# EAGLE board ADE9000 Shield (EAGLE 9.6.2)
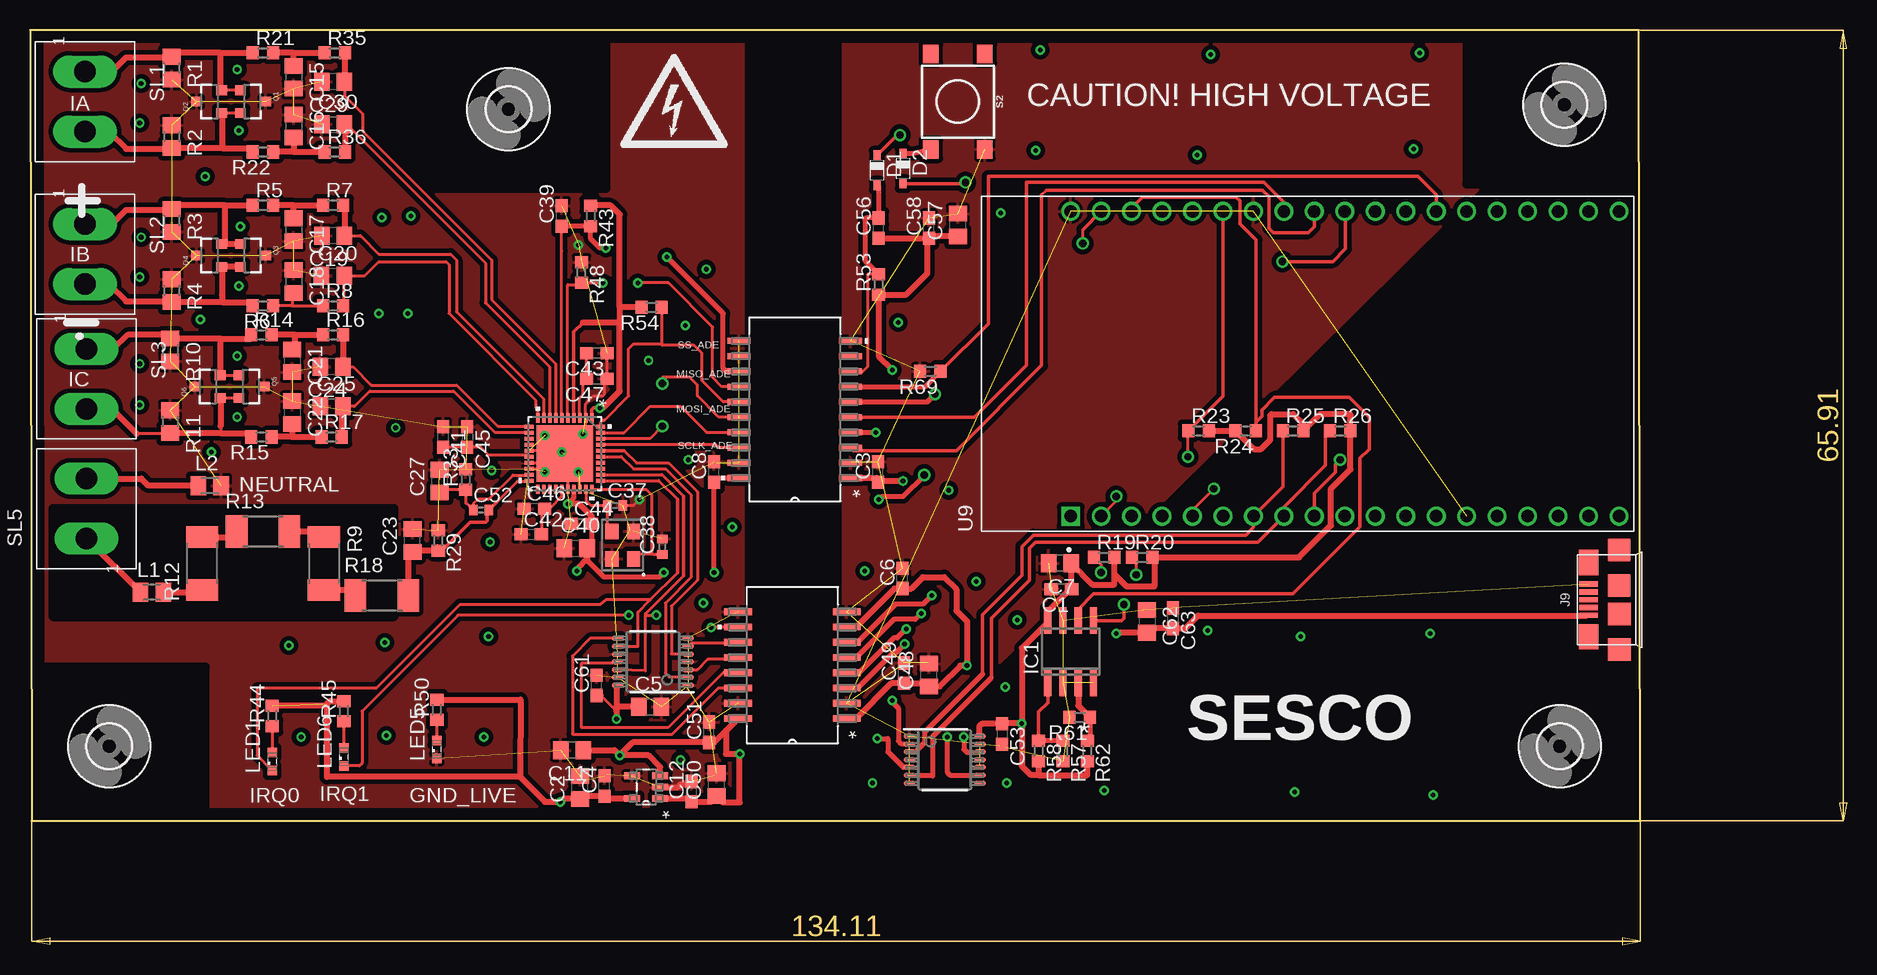
[diagram p0: board, top side]
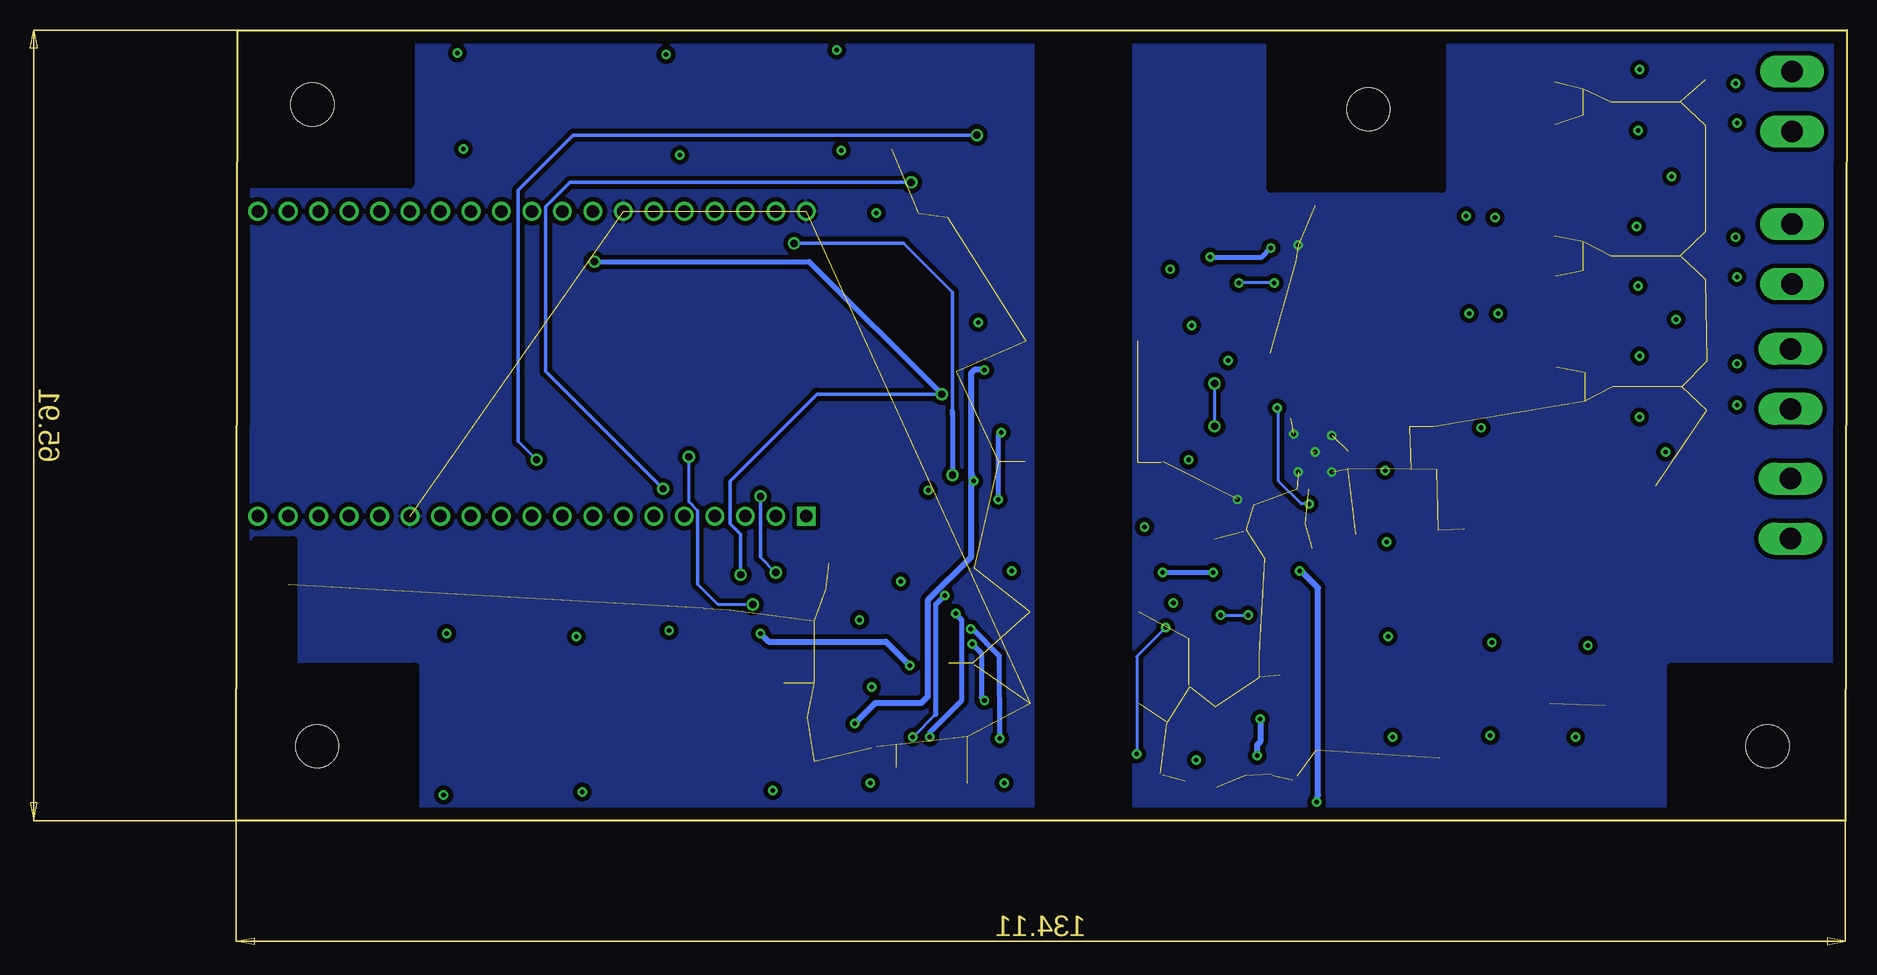
[diagram p1: board, bottom side, seen from below]

Size 134.24 x 65.91 mm. Coordinates in mm from the lower left corner, seen from the top.
Outline: 0.13,0 134.24,0 134.11,65.91 0,65.91 0.13,0
Copper layers (1*16): Top 0.035mm / dielectric 1.5mm / Bottom 0.035mm
Design rules "default": minimum track width 10mil, minimum drill 24mil, track to track 8mil, track to pad 8mil, pad to pad 8mil, via to via 8mil, smd to smd 8mil, copper to edge 40mil, drill to drill 8mil, minimum pad ring 10mil, minimum via ring 8mil, stop-mask expansion 4mil, vias tented up to drill 0mil, thermal gap 10mil
tRestrict: area 1.9,17 to 30.4,26; area 0.4,0.1 to 14.6,12.8; area 119.4,0.1 to 133.6,12.8; area 119.8,53.1 to 134,65.8; area 33.8,52.7 to 48,65.4; area 129.5,13.3 to 132.6,23.4; area 59.9,-0.1 to 67.3,66
bRestrict: area 0.4,0.1 to 14.6,12.8; area 119.4,0.1 to 133.6,12.8; area 119.8,53.1 to 134,65.8; area 33.8,52.7 to 48,65.4; area 129.5,13.3 to 132.6,23.4; area 59.9,-0.1 to 67.3,66

## Footprints (pad centres in the part's own frame; a part is rotated, then mirrored left to right if it is on the bottom)
C0603 = smd 1.1 x 1: 1 -0.85,0; 2 0.85,0
C0805 = smd 1.3 x 1.5: 1 -0.95,0; 2 0.95,0
C0402 = smd 0.7 x 0.9: 1 -0.65,0; 2 0.65,0
SOD323_ST = smd 0.8 x 0.6: A 1.25,0; C -1.25,0
3,6 = hole 3.6: 0,0
SO-08 = smd 0.6 x 2.2: 1 -1.905,-2.6; 2 -0.635,-2.6; 3 0.635,-2.6; 4 1.905,-2.6; 5 1.905,2.6; 6 0.635,2.6; 7 -0.635,2.6; 8 -1.905,2.6
USB-MICRO-10103594 = smd 0.4 x 1.6: D+ 0,0; D- -0.65,0; GND 1.3,0; ID 0.65,0; VBUS -1.3,0 | smd 1.9 x 1.9: SHLD1 -1.2,-2.55; SHLD2 1.2,-2.55; SHLD3 -4.15,-2.55; SHLD4 4.15,-2.55 | smd 2.1 x 1.6: SHLD5 3.1,0; SHLD6 -3.1,0
M0805 = smd 1.3 x 1.6: 1 -0.95,0; 2 0.95,0
SML0603 = smd 0.8 x 0.8: A 0.75,0; C -0.75,0
SOT23-3 = smd 0.8 x 0.9: 1 -0.95,-1; 2 0.95,-1; 3 0,1.1
SMD_4PIN_3.2X2.1 = smd 1.3 x 1.1: 1 -1.15,-0.9; 2 1.15,-0.9; 3 1.15,0.9; 4 -1.15,0.9
R0805 = smd 1.3 x 1.5: 1 -0.95,0; 2 0.95,0
R0603 = smd 1 x 1.1: 1 -0.85,0; 2 0.85,0
R2010 = smd 1.8 x 2.7: 1 -2.2,0; 2 2.2,0
TACTILE_SWITCH_SMD_6.2MM_TALL = smd 1.55 x 1.3: A1 -3.975,-2.25; A2 3.975,-2.25; B1 -3.975,2.25; B2 3.975,2.25
02P = drill 1.778 long: 1 -2.5,0; 2 2.5,0
CP_40_7 = smd 0.762 x 0.305: 1 -2.972,2.25; 2 -2.972,1.75; 3 -2.972,1.25; 4 -2.972,0.75; 5 -2.972,0.25; 6 -2.972,-0.25; 7 -2.972,-0.75; 8 -2.972,-1.25; 9 -2.972,-1.75; 10 -2.972,-2.25; 21 2.972,-2.25; 22 2.972,-1.75; 23 2.972,-1.25; 24 2.972,-0.75; 25 2.972,-0.25; 26 2.972,0.25; 27 2.972,0.75; 28 2.972,1.25; 29 2.972,1.75; 30 2.972,2.25 | smd 0.305 x 0.762: 11 -2.25,-2.972; 12 -1.75,-2.972; 13 -1.25,-2.972; 14 -0.75,-2.972; 15 -0.25,-2.972; 16 0.25,-2.972; 17 0.75,-2.972; 18 1.25,-2.972; 19 1.75,-2.972; 20 2.25,-2.972; 31 2.25,2.972; 32 1.75,2.972; 33 1.25,2.972; 34 0.75,2.972; 35 0.25,2.972; 36 -0.25,2.972; 37 -0.75,2.972; 38 -1.25,2.972; 39 -1.75,2.972; 40 -2.25,2.972 | smd 4.699 x 4.699: 41 0,0
RI_16_1 = smd 2.306 x 0.561: 1 -4.527,4.445; 2 -4.527,3.175; 3 -4.527,1.905; 4 -4.527,0.635; 5 -4.527,-0.635; 6 -4.527,-1.905; 7 -4.527,-3.175; 8 -4.527,-4.445; 9 4.527,-4.445; 10 4.527,-3.175; 11 4.527,-1.905; 12 4.527,-0.635; 13 4.527,0.635; 14 4.527,1.905; 15 4.527,3.175; 16 4.527,4.445
PW0014A_N = smd 0.95 x 0.45: 1 -2.95,1.95; 2 -2.95,1.3; 3 -2.95,0.65; 4 -2.95,0; 5 -2.95,-0.65; 6 -2.95,-1.3; 7 -2.95,-1.95; 8 2.95,-1.95; 9 2.95,-1.3; 10 2.95,-0.65; 11 2.95,0; 12 2.95,0.65; 13 2.95,1.3; 14 2.95,1.95
UJ_5 = smd 1.321 x 0.559: 1 -1.168,0.95; 2 -1.168,0; 3 -1.168,-0.95; 4 1.168,-0.95; 5 1.168,0.95
RI_20_1 = smd 1.921 x 0.511: 1 -4.65,5.715; 2 -4.65,4.445; 3 -4.65,3.175; 4 -4.65,1.905; 5 -4.65,0.635; 6 -4.65,-0.635; 7 -4.65,-1.905; 8 -4.65,-3.175; 9 -4.65,-4.445; 10 -4.65,-5.715; 11 4.65,-5.715; 12 4.65,-4.445; 13 4.65,-3.175; 14 4.65,-1.905; 15 4.65,-0.635; 16 4.65,0.635; 17 4.65,1.905; 18 4.65,3.175; 19 4.65,4.445; 20 4.65,5.715
ESPRESSIF_ESP32-DEVKITC-32UE = drill 1.04 square: 1 -12.7,22.86 | drill 1.04: 2 -12.7,20.32; 3 -12.7,17.78; 4 -12.7,15.24; 5 -12.7,12.7; 6 -12.7,10.16; 7 -12.7,7.62; 8 -12.7,5.08; 9 -12.7,2.54; 10 -12.7,0; 11 -12.7,-2.54; 12 -12.7,-5.08; 13 -12.7,-7.62; 14 -12.7,-10.16; 15 -12.7,-12.7; 16 -12.7,-15.24; 17 -12.7,-17.78; 18 -12.7,-20.32; 19 -12.7,-22.86; 20 12.7,22.86; 21 12.7,20.32; 22 12.7,17.78; 23 12.7,15.24; 24 12.7,12.7; 25 12.7,10.16; 26 12.7,7.62; 27 12.7,5.08; 28 12.7,2.54; 29 12.7,0; 30 12.7,-2.54; 31 12.7,-5.08; 32 12.7,-7.62; 33 12.7,-10.16; 34 12.7,-12.7; 35 12.7,-15.24; 36 12.7,-17.78; 37 12.7,-20.32; 38 12.7,-22.86

## Placement (x,y rotation side)
C1  0.1u  [C0603]  85.98,19.3 180 top
C2  10u  [C0805]  45.85,2.79 90 top
C3  0.1u  [C0603]  70.69,29.08 90 top
C4  0.1u  [C0603]  47.88,2.92 90 top
C5  4.7u  [C0805]  51.69,9.52 0 top
C6  0.1u  [C0603]  72.72,20.22 90 top
C7  4.7u  [C0805]  85.85,21.46 180 top
C8  0.1u  [C0603]  57.02,29.08 90 top
C11  10u  [C0805]  45.19,5.89 180 top
C12  0.1u  [C0603]  55.14,2.44 90 top
C15  DNP  [C0805]  21.97,61.98 270 top
C16  DNP  [C0805]  21.97,57.91 270 top
C17  DNP  [C0805]  21.97,49.28 270 top
C18  DNP  [C0805]  21.97,44.96 270 top
C19  0.022u  [C0805]  25.27,48.77 180 top
C20  0.022u  [C0805]  25.25,45.42 0 top
C21  DNP  [C0805]  21.84,38.35 270 top
C22  DNP  [C0805]  21.84,34.04 270 top
C23  0.022u  [C0805]  31.88,23.37 90 top
C24  0.022u  [C0805]  25.15,37.85 180 top
C25  0.022u  [C0805]  25.15,34.54 0 top
C27  0.022u  [C0805]  34.16,28.32 90 top
C29  0.022u  [C0805]  25.27,61.59 180 top
C30  0.022u  [C0805]  25.27,58.04 0 top
C37  18p  [C0402]  48.77,26.29 0 top
C38  18p  [C0402]  52.7,22.86 90 top
C39  1u  [C0603]  44.32,50.42 90 top
C40  4.7u  [C0805]  45.49,22.73 0 top
C41  4.7u  [C0603]  34.42,32 270 top
C42  4.7u  [C0603]  41.78,23.88 0 top
C43  4.7u  [C0603]  47.24,38.99 180 top
C44  0.1u  [C0603]  45.97,24.77 0 top
C45  0.1u  [C0603]  36.45,32 270 top
C46  0.1u  [C0603]  42.04,26.04 0 top
C47  0.1u  [C0603]  47.24,36.83 180 top
C48  10u  [C0805]  74.93,12.17 90 top
C49  0.1u  [C0603]  72.85,12.32 90 top
C50  10u  [C0805]  57.23,3.02 90 top
C51  0.1u  [C0603]  56.62,7.39 90 top
C52  51p  [C0402]  37.59,25.91 0 top
C53  0.1u  [C0603]  81.03,7.24 270 top
C56  1u  [C0603]  70.74,49.4 90 top
C57  10u  [C0805]  77.34,49.66 90 top
C58  0.1u  [C0603]  74.93,49.4 90 top
C61  0.1u  [C0603]  47.24,11.3 90 top
C62  22u  [C0805]  93.09,16.64 270 top
C63  0.1u  [C0603]  95.25,16.89 270 top
D1  BAT54WS  [SOD323_ST]  70.61,54.23 270 top
D2  BAT54WS  [SOD323_ST]  72.77,54.36 270 top
DRILEGEND  [DRILEGEND]  12.31,-38.21 0 top  (outside the outline)
H1  MOUNT-HOLE3.6  [3,6]  6.6,6.22 0 top
H2  MOUNT-HOLE3.6  [3,6]  39.88,59.31 0 top
H3  MOUNT-HOLE3.6  [3,6]  127.89,59.69 0 top
H4  MOUNT-HOLE3.6  [3,6]  127.51,6.22 0 top
IC1  24LC32A/SN  [SO-08]  86.74,14.1 0 top
J9  ZX62-AB-5PA(31)  [USB-MICRO-10103594]  129.92,18.44 90 top
L1  1500  [M0805]  10.16,19.05 0 top
L2  1500  [M0805]  14.99,27.94 0 top
LED1  APT1608LSECK/J3-PRV  [SML0603]  20.19,4.95 90 top
LED5  APT1608LZGCK  [SML0603]  33.91,5.97 90 top
LED6  APT1608LSECK/J3-PRV  [SML0603]  26.16,5.33 90 top
Q1  MMBD4148SE  [SOT23-3]  18.54,59.94 270 top
Q2  MMBD4148SE  [SOT23-3]  14.99,59.94 90 top
Q3  MMBD4148SE  [SOT23-3]  18.54,47.12 270 top
Q4  MMBD4148SE  [SOT23-3]  14.99,47.12 90 top
Q5  MMBD4148SE  [SOT23-3]  18.41,36.2 270 top
Q6  MMBD4148SE  [SOT23-3]  14.86,36.2 90 top
Q8  ECS-245.7-12-33Q-JES-TR  [SMD_4PIN_3.2X2.1]  49.4,22.99 90 top
R1  5.1  [R0805]  11.81,62.74 270 top
R2  5.1  [R0805]  11.81,57.02 270 top
R3  5.1  [R0805]  11.81,50.04 270 top
R4  5.1  [R0805]  11.81,44.2 270 top
R5  0  [R0603]  19.43,51.31 0 top
R6  0  [R0603]  19.43,42.93 180 top
R7  1k  [R0603]  25.27,51.31 0 top
R8  1k  [R0603]  25.27,42.93 0 top
R9  200k  [R2010]  24.51,21.46 270 top
R10  5.1  [R0805]  11.68,39.24 270 top
R11  5.1  [R0805]  11.68,33.27 270 top
R12  200k  [R2010]  14.35,21.46 90 top
R13  200k  [R2010]  19.43,24.13 0 top
R14  0  [R0603]  19.3,40.51 0 top
R15  0  [R0603]  19.3,32 180 top
R16  1k  [R0603]  25.27,40.51 0 top
R17  1k  [R0603]  25.15,32 0 top
R18  200k  [R2010]  29.34,18.8 0 top
R19  10k  [R0603]  89.53,21.97 0 top
R20  10k  [R0603]  92.71,21.97 0 top
R21  0  [R0603]  19.43,64.01 0 top
R22  0  [R0603]  19.43,55.75 180 top
R23  10k  [R0603]  97.41,32.51 0 top
R24  10k  [R0603]  101.35,32.51 180 top
R25  10k  [R0603]  105.28,32.51 0 top
R26  10k  [R0603]  109.22,32.51 0 top
R29  1k  [R0603]  34.04,23.37 270 top
R33  1k  [R0603]  36.32,28.45 90 top
R35  1k  [R0603]  25.4,64.01 0 top
R36  1k  [R0603]  25.4,55.75 0 top
R43  10k  [R0603]  46.74,50.42 270 top
R44  3k  [R0603]  20.19,8.76 90 top
R45  3k  [R0603]  26.16,9.14 90 top
R48  10k  [R0603]  45.97,45.72 270 top
R50  3k  [R0603]  33.91,9.27 90 top
R53  10k  [R0603]  70.74,44.7 90 top
R54  10k  [R0603]  51.82,42.8 180 top
R57  0  [R0603]  86.11,5.84 270 top
R58  DNP  [R0603]  84.07,5.84 270 top
R61  DNP  [R0603]  87.5,8.64 180 top
R62  0  [R0603]  88.14,5.84 270 top
R69  10k  [R0603]  75.06,37.46 180 top
S2  PTS645SM43SMTR92  [TACTILE_SWITCH_SMD_6.2MM_TALL]  77.34,59.94 270 top
SL1  25.161.0253.0  [02P]  4.57,59.94 270 top
SL2  25.161.0253.0  [02P]  4.57,47.24 270 top
SL3  25.161.0253.0  [02P]  4.7,36.83 270 top
SL5  25.161.0253.0  [02P]  4.7,26.04 90 top
U1  ADE9000ACPZ  [CP_40_7]  44.58,30.61 270 top
U2  ADUM6404ARIZ  [RI_16_1]  63.55,12.98 180 top
U3  SN74LV4T125PWR  [PW0014A_N]  51.92,13.26 180 top
U4  ADP122AUJZ-3.3-R7  [UJ_5]  51.36,2.82 180 top
U5  ADUM4151BRIZ  [RI_20_1]  63.75,34.29 180 top
U6  SN74LV4T125PWR  [PW0014A_N]  76.25,5.11 0 top
U9  ESP32-DEVKITC-32UE  [ESPRESSIF_ESP32-DEVKITC-32UE]  109.6,38.1 90 top

## Library data of the parts
C1-C8 C11 C12 C48-C51 C53 C57 C58 C61-C63 = eagle-ltspice; SPICEMODEL: NONE; SPICEPREFIX: C
C15-C25 C27 C29 C30 C37-C47 C52 C56 = capacitors; SPICEMODEL: NONE; SPICEPREFIX: C
D1 D2 = diode; DIGIKEY: BAT54WS-FDITR-ND
DRILEGEND = drilegend
H1-H4 = holes
IC1 = microchip; DIGIKEY: 24LC32A/SN-ND; MF: MICROCHIP; MPN: 24LC32A/SN; OC_FARNELL: 9758003; OC_NEWARK: 33C2976
J9 = Connectors; MANUFACTURER: Hirose Electric; MFRPART#: ZX62-AB-5PA(31)
L1 L2 = Inductors; DIGIKEY: 490-1048-1-ND
LED1 LED6 = DIODE_LED; DIGIKEY: 754-1930-1-ND; PARTNO: APT1608LSECK/J3-PRV
LED5 = DIODE_LED; DIGIKEY: 754-1934-1-ND; PARTNO: APT1608LZGCK
Q1-Q6 = DIODE_LED; DIGIKEY: MMBD4148SECT-ND
Q8 = Crystals; DIGIKEY: XC2178CT-ND
R1 = eagle-ltspice; DESCRIPTION: RES, 5.1, 0W1, 0%1, 0805-SMT, ROHS; MANUFACTURER: TE Connectivity Passive Product; MFR_PART_NO_#: CPF0805B5R1E1; SPICEMODEL: NONE; SPICEPREFIX: R
R2-R26 R29 R33 R35 R36 R43-R45 R48 R50 R53 R54 R57 R58 R61 R62 R69 = eagle-ltspice; SPICEMODEL: NONE; SPICEPREFIX: R
S2 = SparkFun-Switches; DIGIKEY: CKN9112TR-ND; PROD_ID: SWCH-11966; SF_SKU: COM-12992
SL1-SL3 SL5 = GEEC_LibrariesCon_GEEC_Voltage; OC_FARNELL: unknown; OC_NEWARK: unknown
U1 = IC; DIGIKEY: ADE9000ACPZ-RLCT-ND
U2 = IC; DIGIKEY: ADUM6404ARIZ-ND
U3 U6 = IC; COMPTYPE: IC; DIGIKEY: 296-40545-1-ND; MANUFACTURER: Texas Instruments; MOUNTTYPE: SMT; PACKAGEREFERENCE: PW0014A; PARTNUMBER: SN74LV4T125PWR; PIN_COUNT: 14; REFDES: RefDes; ROHS: Y; TYPE: TYPE
U4 = IC; DIGIKEY: ADP122AUJZ-3.3-R7CT-ND
U5 = IC; DIGIKEY: ADUM4151BRIZ-ND
U9 = ESP32-DEVKITC-32UE; AVAILABILITY: In Stock; CHECK_PRICES: https://www.snapeda.com/parts/ESP32-DEVKITC-32UE/Espressif+Systems/view-part/?ref=eda; DESCRIPTION: The ESP32-DEVKITC-32UE evaluation board from Espressif Systems is designed for seamless wireless connectivity in IoT applications. Powered by the ESP32-WROOM-32UE module, it supports dual-mode Bluetooth® Smart Ready 4.x and 802.11 b/g/n Wi-Fi at 2.4GHz. The board features a robust Xtensa® dual-core 32-bit LX6 microprocessor and is equipped with 4MB flash for efficient handling of complex tasks. It includes 26 GPIO pins and an IPEX U.FL antenna for flexible interfacing and reliable wireless performance.; MF: Espressif Systems; MP: ESP32-DEVKITC-32UE; PACKAGE: Package; PRICE: None; SNAPEDA_LINK: https://www.snapeda.com/parts/ESP32-DEVKITC-32UE/Espressif+Systems/view-part/?ref=snap

## Nets
3V3: U9.1
5V: U9.19
5V_ADE: C5.1 C11.1 C12.1 C50.1 C51.1 C61.1 U2.10 U2.16 U3.14 U4.1 U4.3
+3V3: C2.1 C4.1 C8.1 C40.2 C44.2 R43.1 R44.2 R45.2 R50.2 R54.2 U1.1 U1.4 U1.27 U4.5 U5.20
AVDDOUT: C42.2 C46.2 U1.25
CF1_ISO: U1.33
CF2_ISO: U1.34
DREADY_ADE: U1.36 U3.5
DREADY_ISO: U6.11
DVDDOUT: C43.2 C47.2 U1.3
GND: C2.2 C4.2 C5.2 C8.2 C11.2 C12.2 C15.2 C16.1 C17.2 C18.1 C19.2 C20.1 C21.2 C22.1 C23.2 C24.2 C25.1 C27.2 C29.2 C30.1 C37.2 C38.2 C39.2 C40.1 C41.1 C42.1 C43.1 C44.1 C45.1 C46.1 C47.1 C50.2 C51.2 C61.2 L2.2 LED5.C Q1.3 Q2.3 Q3.3 Q4.3 Q5.3 Q6.3 Q8.2 Q8.4 R1.2 R2.1 R3.2 R4.1 R10.2 R11.1 R29.1 R33.2 R48.1 U1.2 U1.15 U1.17 U1.18 U1.26 U1.28 U1.41 U2.9 U2.15 U3.1 U3.4 U3.7 U3.10 U3.13 U4.2 U4.4 U5.11 U5.12 U5.19
GNDA: C1.2 C3.2 C6.2 C7.2 C48.2 C49.2 C53.2 C57.2 C58.2 C62.1 C63.1 IC1.2 IC1.4 IC1.7 J9.GND R57.2 R61.2 R69.2 S2.B2 U2.2 U2.8 U5.2 U5.10 U6.1 U6.4 U6.7 U6.10 U6.13 U9.14 U9.20 U9.26
IAN: C30.2 R36.2 U1.8
IAP: C29.1 R35.2 U1.7
IBN: C20.2 R8.2 U1.10
IBP: C19.1 R7.2 U1.9
ICN: C25.2 R17.2 U1.12
ICP: C24.1 R16.2 U1.11
INN: U1.14
INP: U1.13
IRQ0_ADE: LED1.C U1.31 U3.9
IRQ0_ISO: R25.1 U6.3 U9.7
IRQ1_ADE: LED6.C U1.32 U3.12
IRQ1_ISO: R26.1 U6.6 U9.8
MISO_ADE: U1.38 U5.16
MISO_ISO: U5.5 U9.27
MODE_BUT: D2.A U9.5
MOSI_ADE: U1.39 U5.17
MOSI_ISO: U5.4 U9.21
N$1: C37.1 Q8.3 U1.29
N$2: C38.1 Q8.1 U1.30
N$3: Q3.1 Q4.2 R3.1 R5.1 SL2.1
N$4: Q3.2 Q4.1 R4.2 R6.2 SL2.2
N$6: C18.2 R6.1 R8.1
N$7: Q1.1 Q2.2 R1.1 R21.1 SL1.1
N$8: IC1.3 R61.1 R62.1
N$9: C17.1 R5.2 R7.1
N$10: R19.1 U9.2
N$11: Q5.1 Q6.2 R10.1 R14.1 SL3.1
N$13: Q5.2 Q6.1 R11.2 R15.2 SL3.2
N$14: C16.2 R22.1 R36.1
N$15: L2.1 SL5.2
N$17: C22.2 R15.1 R17.1
N$18: C21.1 R14.2 R16.1
N$27: LED1.A R44.1
N$28: LED6.A R45.1
N$30: U2.14 U3.8
N$31: U2.13 U3.11
N$35: L1.2 R12.1
N$36: R12.2 R13.1
N$37: R9.1 R13.2
N$38: R9.2 R18.1
N$39: D2.C S2.A2
N$40: Q1.2 Q2.1 R2.2 R22.2 SL1.2
N$41: C15.1 R21.2 R35.1
N$44: U2.12 U3.3
N$49: U2.11 U3.6
N$50: LED5.A R50.1
N$57: U2.3 U6.2
N$58: U2.4 U6.5
N$59: U2.5 U6.9
N$60: U2.6 U6.12
N$67: L1.1 SL5.1
N$76: IC1.1 R57.1 R58.1
PM1_ADE: R48.2 U1.5 U5.14
PM1_ISO: R69.1 U5.7 U9.32
REF: C41.2 C45.2 U1.16
RESET_ADE: C39.1 R43.2 U1.6 U5.13
RESET_ESP: D1.C U9.9
RESET_ISO: C56.2 D1.A R53.2 U5.8
SCL_ARDUINO: IC1.6 R24.1 U9.22
SCLK_ADE: U1.37 U5.18
SCLK_ISO: U5.3 U9.28
SDA_ARDUINO: IC1.5 R23.1 U9.25
SS_ADE: R54.1 U1.40 U5.15
SS_ISO: R20.1 U5.6 U9.29
V+: C1.1 C3.1 C7.1 C53.1 C56.1 C57.1 C58.1 IC1.8 R19.2 R20.2 R23.2 R24.2 R25.2 R26.2 R53.1 R58.2 R62.2 U5.1 U6.14
VAN: C27.1 C52.1 R33.1 U1.19
VAP: C23.1 C52.2 R18.2 R29.2 U1.20
VCC: C6.1 C48.1 C49.1 C62.2 C63.2 J9.VBUS U2.1 U2.7
ZX_ADE: U1.35 U3.2
ZX_ISO: U6.8

## Tracks (layer width: path | path; a pad name or v marks a point on that pad's centre or on a via)
5V_ADE  (via drill 0.38)
  Top 0.254: v56.77,16.13 56.55,16.13 56.52,16.15 U2.10 | 47.59,10.45 48.9,9.14 | 59.15,5.59 v59.18,5.59
  Top 0.508: C51.1 56.52,6.31 | U4.1 54.86,1.87 C12.1 56.74,1.59 C50.1 57.78,1.52 59.15,1.52 59.15,5.59 58.01,5.59 58.01,7.52 U2.16 57.03,6.54 C51.1 | 52.66,3.77 U4.3 52.53,4.5 51.56,5.46 v49.15,5.46 | v48.9,8.51 48.9,9.14 48.9,9.52 | U3.14 48.9,11.24 48.9,9.52 | C61.1 47.59,10.45 | C5.1 48.9,9.52 | v49.15,5.46 50.23,6.54 C51.1 | C11.1 48.72,5.89 v49.15,5.46
  Bottom 0.254: v59.18,5.59 59.18,13.72 v56.77,16.13
  Bottom 0.508: v49.15,5.46 49.15,6.35 48.9,6.6 v48.9,8.51
+3V3  (via drill 0.38)  (1 unrouted)
  Top 0.254: 46.77,51.31 R43.1 | 49.15,41.53 49.05,41.53 49.15,41.43 | 57.36,28.58 C8.1 | v47.5,34.42 47.75,34.42
  Top 0.305: 46.86,23.73 46.86,24.73 C44.2 | 46.1,41.53 45.33,40.75 U1.4 | 46.44,21.72 C40.2 | U1.1 46.83,34.25 46.99,34.42 v47.5,34.42
  Top 0.381: 47.88,2 C4.1
  Top 0.406: C44.2 46.82,23.11 C40.2 46.44,21.84 | v52.83,20.7 52.45,20.32 47.84,20.32 46.44,21.72 | v57.02,20.7 C8.1 | U5.20 57.36,28.58 | U1.27 45.33,26.91 v44.83,26.42
  Top 0.508: 46.77,51.31 48.39,51.31 49.15,50.55 49.15,42.8 | 49.15,42.8 49.15,41.53 | 49.05,41.53 46.1,41.53 | U4.5 47.88,1.87 C4.1 46.07,2.07 C2.1 44.46,1.84 v44.21,1.59 42.94,1.59 40.84,3.68 | v45.59,20.83 45.59,21 46.44,21.84 | R54.2 49.15,42.8 | 47.75,34.42 49.15,35.81 49.15,41.43 | 24.77,9.78 24.98,9.99 R45.2 | R44.2 24.77,9.61 24.77,3.68 40.84,3.68 | C44.2 46.82,25.38 45.78,26.42 v44.83,26.42 | R50.2 40.9,10.12 40.84,3.68
  Bottom 0.254: v44.83,26.42 45.47,26.42 47.37,28.32 47.37,34.04 v47.5,34.42
  Bottom 0.406: v52.83,20.7 v57.02,20.7
  Bottom 0.508: v45.59,20.83 45.47,20.83 44.07,19.43 44.07,2.16 44.08,2.15 v44.21,1.59
AVDDOUT
  Top 0.254: U1.25 44.33,27.05 43.31,26.04 C46.2 42.63,25.78 C42.2
DREADY_ADE
  Top 0.254: 54.54,13.91 U3.5 53.47,13.91 53.47,17.91 55.63,20.07 55.63,27.43 53.21,29.85 50.55,29.85 49.53,30.86
  Top 0.305: U1.36 49.53,30.86
DVDDOUT
  Top 0.254: U1.3 45.83,35.29 46.1,35.56 46.1,36.54 C47.2 C43.2
GND  (via drill 0.38)  (68 unrouted)
  Top 0.254: U1.41 46.36,32.38 46.36,32.64 46.23,32.64 46.33,32.74 U1.2 46.33,34.77 46.99,35.43 47.75,35.43 47.88,35.56 47.88,36.61 C47.1 C43.1 | U1.28 45.83,29.36 U1.41 | U1.26 44.83,30.36 U1.41 | U1.18 43.33,29.36 U1.41 | U1.41 43.83,29.86 U1.17 41.59,29.85 | U1.15 44.33,30.86 U1.41 | 50.04,24.26 50.04,24.51 Q8.2 | C37.2 50.29,26.29 v50.8,26.8 | U3.1 54.74,11.18 | 57.19,29.85 C8.2 | C20.1 24.26,45.41 | C24.2 24.3,37.85 | C25.1 24.3,34.54 | 31.88,24.22 C23.2
  Top 0.508: 56.66,8.15 C51.2 | 48,3.9 C4.2 | 46.2,3.39 C2.2 | U4.2 54,2.82 54.23,3.05 54.9,3.05 C12.2 | 57.05,3.8 C50.2
  other vias: 42.93,32.13 46.1,32.26 45.72,29.08 42.93,29.08 44.32,30.73 45.72,48.01
  pour Top (isolate 0.381): 0.13,65.91 59.94,65.91 59.94,0 0.13,0
  pour Bottom (isolate 0.381): 59.94,65.91 0.13,65.91 0.13,0 59.94,0
GND1  (via drill 0.38)
  other vias: 105.41,2.41
GND2  (via drill 0.38)
  other vias: 9.27,61.47
GND3  (via drill 0.38)
  other vias: 9.14,58.17
GND4  (via drill 0.38)
  other vias: 9.27,48.64
GND5  (via drill 0.38)
  other vias: 9.14,45.34
GND6  (via drill 0.38)
  other vias: 9.14,38.1
GND7  (via drill 0.38)
  other vias: 9.14,34.67
GND8  (via drill 0.38)
  other vias: 14.22,41.78
GND9  (via drill 0.38)
  other vias: 17.27,38.73
GND10  (via drill 0.38)
  other vias: 17.27,33.65
GND11  (via drill 0.38)
  other vias: 17.53,49.53
GND12  (via drill 0.38)
  other vias: 17.4,44.58
GND13  (via drill 0.38)
  other vias: 17.4,57.53
GND14  (via drill 0.38)
  other vias: 17.27,62.61
GND15  (via drill 0.38)
  other vias: 14.61,53.72
GND16  (via drill 0.38)
  other vias: 29.34,50.29
GND17  (via drill 0.38)
  other vias: 31.75,50.42
GND18  (via drill 0.38)
  other vias: 29.08,42.29
GND19  (via drill 0.38)
  other vias: 31.5,42.29
GND20  (via drill 0.38)
  other vias: 38.48,29.21
GND21  (via drill 0.38)
  other vias: 30.48,32.77
GND22  (via drill 0.38)
  other vias: 38.35,23.24
GND23  (via drill 0.38)
  other vias: 38.23,15.37
GND24  (via drill 0.38)
  other vias: 29.59,14.86
GND25  (via drill 0.38)
  other vias: 21.59,14.6
GND26  (via drill 0.38)
  other vias: 22.61,6.99
GND27  (via drill 0.38)
  other vias: 78.87,19.94
GND28  (via drill 0.38)
  other vias: 37.85,6.99
GND29  (via drill 0.38)
  other vias: 29.72,7.11
GND30  (via drill 0.38)
  other vias: 81.28,11.18
GND31  (via drill 0.38)
  other vias: 98.17,15.87
GND32  (via drill 0.38)
  other vias: 105.92,15.37
GND33  (via drill 0.38)
  other vias: 116.71,15.62
GND34  (via drill 0.38)
  other vias: 80.9,50.67
GND35  (via drill 0.38)
  other vias: 72.39,41.53
GND36  (via drill 0.38)
  other vias: 69.6,20.83
GND37  (via drill 0.38)
  other vias: 70.23,3.17
GND38  (via drill 0.38)
  other vias: 81.41,3.17
GND39  (via drill 0.38)
  other vias: 82.3,16.76
GND40  (via drill 0.38)
  other vias: 89.53,2.54
GND41  (via drill 0.38)
  other vias: 76.58,27.56
GND42  (via drill 0.38)
  other vias: 54.61,41.27
GND43  (via drill 0.38)
  other vias: 51.56,38.35
GND44  (via drill 0.38)
  other vias: 54.86,30.1
GND45  (via drill 0.38)
  other vias: 56.39,45.97
GND46  (via drill 0.38)
  other vias: 58.55,24.51
GND47  (via drill 0.38)
  other vias: 54.23,5.08
GND48  (via drill 0.38)
  other vias: 56.13,18.16
GND49  (via drill 0.38)
  other vias: 15.11,30.73
GND50  (via drill 0.38)
  other vias: 116.97,2.16
GND51  (via drill 0.38)
  other vias: 115.82,64.01
GND52  (via drill 0.38)
  other vias: 115.32,56.01
GND53  (via drill 0.38)
  other vias: 98.42,63.88
GND54  (via drill 0.38)
  other vias: 97.28,55.5
GND55  (via drill 0.38)
  other vias: 84.2,64.26
GND56  (via drill 0.38)
  other vias: 83.82,55.88
GNDA  (30 unrouted)
  Top 0.254: 80.86,6.22 C53.2 | 79.2,6.38 U6.13 | 95.29,17.78 C63.1
  Top 0.508: 68.49,29.93 U5.2 | 74.88,13.17 C48.2 | 81.32,6.1 C53.2 | 72.66,12.98 C49.2
  pour Bottom (isolate 0.381): 67.56,0 67.56,65.91 134.15,65.91 134.15,0
  pour Top (isolate 0.381): 134.16,65.91 67.56,65.91 67.56,0 134.16,65.91
IAN
  Top 0.254: U1.8 43.31,33.6 43.31,37.85 37.97,43.18 37.97,46.48 26.42,58.04 C30.2 26.25,58.04
  Top 0.508: 26.25,58.04 R36.2
IAP
  Top 0.254: C29.1 26.22,60.45 27.75,58.93 27.75,57.47 38.48,46.74 38.48,43.43 43.81,38.1 U1.7 | R35.2 26.22,64.01
  Top 0.508: 26.22,64.01 C29.1
IBN
  Top 0.254: U1.10 42.32,34.29 42.16,34.44 42.16,35.05 34.92,42.29 34.92,46.35 34.67,46.61 29.08,46.61 27.89,45.41 C20.2 26.2,42.93 R8.2 26.1,43.33
IBP
  Top 0.254: U1.9 42.8,33.61 42.8,35.18 35.56,42.42 35.56,46.74 35.05,47.24 29.08,47.24 27.56,48.77 C19.1 | R7.2 26.22,51.31
  Top 0.508: 26.22,51.31 C19.1
ICN
  Top 0.254: U1.12 41.58,32.38 38.73,32.38 35.31,35.81 28.32,35.81 27.05,34.54 C25.2 26,34.54
  Top 0.508: 26,34.54 R17.2
ICP
  Top 0.254: C24.1 26.92,37.85 28.45,36.32 35.56,36.32 38.99,32.89 41.57,32.89 U1.11 | R16.2 26.1,40.51
  Top 0.508: 26.1,40.51 C24.1
IRQ0_ADE
  Top 0.254: U1.31 52.41,28.36 53.98,26.8 | U3.9 50.67,14.56 50.67,17.4 51.69,18.42 | 51.69,18.42 53.98,20.7 | 51.69,18.42 48,18.42 47.5,18.03 35.81,18.03 28.84,11.05 18.93,11.05 18.93,5.47 LED1.C | LED1.C 20.21,4.19 | 19.93,3.94 LED1.C
  Top 0.305: 53.98,20.7 53.98,26.8
IRQ0_ISO
  Top 0.254: U6.3 73.81,5.75 | 82.59,20.38 82.68,20.47
  Top 0.305: 82.59,20.38 79.41,17.2 79.41,12.24 | R25.1 104.43,27.85 U9.7 101.98,24.46 101.35,23.83 83.64,23.83 82.68,22.86 82.68,20.47
  Top 0.406: 79.41,12.24 74.57,7.41 74.57,6.52 73.81,5.75
IRQ1_ADE  (via drill 0.38)
  Top 0.254: U1.32 52.68,28.86 54.48,27.05 | U3.12 51.31,12.5 51.31,17.14 | 51.31,17.14 51.31,17.27 54.48,20.45 | 51.31,17.14 v52.2,17.14 | v49.91,17.14 35.69,17.14 27.69,9.14 27.69,4.83 27.44,4.58 LED6.C | LED6.C | 25.9,4.32 LED6.C
  Top 0.305: 54.48,20.45 54.48,27.05
  Bottom 0.254: v52.2,17.14 v49.91,17.14
IRQ1_ISO
  Top 0.305: 80.14,11.95 80.14,16.89 83.31,20.07 83.31,22.73 83.82,23.24 102.36,23.24 U9.8 104.52,26.16 107.99,29.63 107.99,32.13 R26.1
  Top 0.406: U6.6 73.34,3.76 75.27,3.76 75.27,7.08 80.14,11.95
MISO_ADE  (via drill 0.61)
  Top 0.254: U5.16 57.4,33.65 55.63,35.43 55.63,36.32 54.99,36.96 52.7,36.96 v52.7,36.45 | v52.7,32.89 51.67,31.86 U1.38
  Bottom 0.254: v52.7,36.45 v52.7,32.89
MISO_ISO
  Top 0.305: U9.27 104.52,51.56 102.87,53.21 83.06,53.21 83.06,37.97 78.74,33.65 U5.5
MODE_BUT  (via drill 0.61)
  Top 0.254: 77.87,53.11 v77.98,53.21 | v98.68,27.69 96.9,25.91 U9.5
  Top 0.305: D2.A 77.87,53.11
  Bottom 0.305: v77.98,53.21 106.43,53.21 108.46,51.18 108.46,37.46 v98.68,27.69
MOSI_ADE
  Top 0.254: U5.17 56.39,32.38 54.23,34.54 51.69,34.54 49.5,32.36 U1.39
MOSI_ISO  (via drill 0.38, 0.61)
  Top 0.254: v87.76,48.13 87.76,49.28
  Top 0.305: 87.76,49.28 U9.21
  Top 0.406: U5.4 v70.48,32.38 | v70.74,26.8 70.99,27.05 72.77,27.05 v74.55,28.83
  Bottom 0.254: 74.55,44.07 78.61,48.13
  Bottom 0.305: 74.55,33.91 74.55,44.07 | 78.61,48.13 v87.76,48.13
  Bottom 0.406: v70.48,32.38 70.74,32.13 v70.74,26.8 | 74.55,34.16 74.55,33.91 v74.55,28.83
N$1
  Top 0.254: U1.29 46.36,27.61 46.36,26.67 46.74,26.29 C37.1 48.12,24.52 Q8.3
N$2
  Top 0.254: U1.30 51.36,27.64 51.82,27.18 51.82,22.34 51.94,22.21 | 51.94,22.21 C38.1 | 51.94,22.21 50.68,22.21 Q8.1
N$3
  Top 0.254: 11.49,50.93 R3.1 11.81,51.31 | Q4.2 16.26,48.07
  Top 0.508: SL2.1 6.82,49.74 8,50.93 11.49,50.93 | 16.26,51.31 R5.1 | 16.26,51.31 11.81,51.31 | 16.26,48.07 16.26,51.31 | Q3.1 Q4.2
N$4
  Top 0.254: 11.49,43.31 R4.2 | Q4.1 16,46.17 | 16,43.81 16,43.63 | 18.58,43.25 R6.2
  Top 0.508: SL2.2 6.56,44.74 8,43.31 11.49,43.31 | Q3.2 Q4.1 | 16,46.17 16,43.81 16,43.25 | 16,43.25 R4.2 | 16,43.25 18.58,43.25
N$6
  Top 0.254: 21.84,42.93 R6.1 | 21.84,42.93 R8.1 | C18.2 21.84,44.01 21.84,42.93
N$7
  Top 0.254: 11.49,63.63 R1.1 11.81,64.01 | Q1.1 Q2.2 15.88,60.89
  Top 0.508: SL1.1 6.82,62.44 8,63.63 11.49,63.63 | 15.88,64.01 R21.1 | 15.88,64.01 11.81,64.01 | 15.88,60.89 15.88,64.01
N$8
  Top 0.254: IC1.3 87.5,11.37
  Top 0.406: R61.1 88.35,6.91 R62.1
  Top 0.508: IC1.3 87.38,9.61 R61.1
N$9
  Top 0.508: 21.97,51.31 R5.2 | 21.97,51.31 R7.1 | C17.1 21.97,51.31
N$10  (via drill 0.61)
  Top 0.254: R19.1 89.28,21.38 v89.28,20.7 | v90.55,27.05 90.55,26.67 U9.2
  Bottom 0.254: v89.28,20.7 90.55,21.97
  Bottom 0.305: 90.55,21.97 v90.55,27.05
N$11
  Top 0.254: 15.49,37.14 Q6.2 | Q6.2 Q5.1 | Q6.2 15.88,37.14 | 18.45,40.19 R14.1
  Top 0.508: SL3.1 6.94,39.33 8.13,40.51 11.36,40.51 R10.1 15.88,40.19 | 15.88,40.19 18.45,40.19 | 15.88,37.14 15.88,40.19
N$13
  Top 0.254: 8.88,32.27 8.89,32.32 R11.2 | Q5.2 Q6.1 15.88,35.24 | 18.45,32.32 R15.2 | 15.88,32.89 15.88,32.32
  Top 0.508: SL3.2 6.82,34.33 8.88,32.27 | 15.88,35.24 15.88,32.89 | R11.2 15.88,32.32 18.45,32.32
N$14
  Top 0.254: 21.97,56.01 C16.2
  Top 0.508: 21.97,55.75 R22.1 | 21.97,55.75 R36.1 | C16.2 21.97,55.75
N$15
  Top 0.508: L2.1 9.87,27.94 9.27,28.54 SL5.2
N$17
  Top 0.508: 21.84,32 R15.1 | 21.84,32 R17.1 | C22.2 21.84,32
N$18
  Top 0.254: C21.1 22.1,39.3
  Top 0.508: 22.1,40.51 R14.2 | 22.1,40.51 R16.1 | 22.1,39.3 22.1,40.51
N$27
  Top 0.254: R44.1 LED1.A
N$28
  Top 0.254: R45.1 LED6.A
N$30
  Top 0.254: U2.14 57.37,11.07 53.54,7.24 45.21,7.24 45.21,13.74 46.68,15.21 U3.8
N$31
  Top 0.254: U2.13 57.75,12.34 53.18,7.77 45.97,7.77 45.97,13.13 48.84,13.13 U3.11
N$35
  Top 0.254: 14.14,19.05 R12.1
  Top 0.508: L1.2 14.14,19.05
N$36
  Top 0.254: 16.76,23.66 R13.1
  Top 0.508: R12.2 16.76,23.66
N$37
  Top 0.508: R13.2 24.04,24.13 R9.1
N$38
  Top 0.254: 27.22,19.26 R18.1
  Top 0.508: R9.2 27.22,19.26
N$39
  Top 0.406: S2.A2 73.64,55.61 D2.C
N$40
  Top 0.254: 11.49,56.01 R2.2 | Q1.2 Q2.1 16,58.99 | 18.58,56.07 R22.2
  Top 0.508: SL1.2 6.56,57.44 8,56.01 11.49,56.01 | 16,56.07 R2.2 | 16,56.07 18.58,56.07 | 16,58.99 16,56.07
N$41
  Top 0.254: 21.97,63.63 C15.1
  Top 0.508: 21.97,64.01 R21.2 | 21.97,64.01 R35.1 | C15.1 21.97,64.01
N$44
  Top 0.254: U3.3 55.63,12.61 56.48,13.46 59.02,13.46 U2.12
N$49
  Top 0.254: U2.11 58.95,14.81 55.12,14.81 U3.6
N$50
  Top 0.254: R50.1 LED5.A
N$57  (via drill 0.38)
  Top 0.254: U6.2 73.23,6.48 | v71.88,10.03 71.88,9.91
  Top 0.406: v72.9,14.73 72.16,13.99 71.89,13.99 68.97,11.07 U2.3 | 71.88,9.91 72.39,9.4 72.39,6.68 72.67,6.41 U6.2
  Bottom 0.406: v72.9,14.73 72.14,13.97 72.14,10.29 v71.88,10.03
N$58  (via drill 0.38)
  Top 0.254: U6.5 73.18,4.57
  Top 0.406: v73.03,16 72.29,15.26 72.02,15.26 69.09,12.34 U2.4 | v70.61,6.86 71.5,6.86 71.5,5.75 72.79,4.46 U6.5
  Bottom 0.254: v73.03,16 72.9,16
  Bottom 0.406: 72.9,16 70.67,13.77 v70.61,6.86
N$59  (via drill 0.38)
  Top 0.254: U6.9
  Top 0.406: v74.3,17.27 73.81,16.79 72.02,16.79 68.84,13.61 U2.5 | v76.45,6.99 76.45,4.06 76.71,3.81 U6.9
  Bottom 0.254: 76.45,7.37 v76.45,6.99
  Bottom 0.406: v74.3,17.27 73.79,16.76 73.79,10.03 76.45,7.37
N$60  (via drill 0.38)
  Top 0.254: 79.16,5.71 U6.12
  Top 0.406: v75.18,18.8 74.45,18.06 72.14,18.06 68.97,14.88 U2.6 | v77.85,6.99 77.85,5.97 78.11,5.71 79.16,5.71
  Bottom 0.254: 75.95,8.89 v77.85,6.99
  Bottom 0.406: v75.18,18.8 75.95,18.03 75.95,8.89
N$67
  Top 0.508: L1.1 4.73,23.54 SL5.1
N$76
  Top 0.305: IC1.1 84.84,9.87 84.07,9.1 R58.1
  Top 0.406: R57.1 R58.1
PM1_ADE  (via drill 0.38)
  Top 0.254: U1.5 44.83,44.7 45.81,44.7 R48.2 47.71,44.87 v47.75,44.83 | v50.67,44.83 53.21,44.83 56.9,41.15 56.9,36.96 57.66,36.2 U5.14
  Bottom 0.254: v47.75,44.83 v50.67,44.83
PM1_ISO
  Top 0.305: U9.32 117.22,52.2 115.7,53.72 79.88,53.72 79.88,41.44 R69.1
  Top 0.406: U5.7 74.64,36.2 R69.1
REF
  Top 0.254: U1.16 41.48,30.48 38.23,30.48 37.55,31.15 C45.2 C41.2
RESET_ADE  (via drill 0.38)
  Top 0.254: U1.6 44.33,47.51 C39.1 | v48.01,47.75 47.5,47.75
  Top 0.406: C39.1 R43.2 46.74,48.51 47.5,47.75 | U5.13 58.04,37.46 57.78,37.72 57.78,42.29 v53.09,46.99
  Bottom 0.406: v53.09,46.99 48.77,46.99 v48.01,47.75
RESET_ESP  (via drill 0.61)
  Top 0.254: 70.63,55.5 D1.C | 72.28,57.15 v72.52,57.15
  Top 0.305: D1.C 72.28,57.15 | v109.21,30.1 108.83,29.72 108.83,29.06 107.06,27.29 U9.9
  Bottom 0.254: 110.74,31.64 v109.21,30.1
  Bottom 0.305: v72.52,57.15 106.17,57.15 110.74,52.58 110.74,31.64
RESET_ISO
  Top 0.254: U5.8 69.42,37.46 69.8,37.85 69.8,45.55 R53.2 | D1.A 70.74,52.85
  Top 0.406: R53.2 69.6,46.7 69.6,50.13 69.72,50.25 C56.2 70.74,51.05 | 70.74,51.07 70.74,51.05 | 70.74,52.85 70.74,51.05
SCL_ARDUINO
  Top 0.254: 91.82,51.1 U9.22
  Top 0.305: IC1.6 87.38,17.65 88.65,18.92 105.28,18.92 110.87,24.51 110.87,30.23 111.63,30.99 111.63,33.65 109.98,35.31 103.75,35.31 102.67,34.22 102.67,33.71 102.2,33.23 | 102.2,33.23 102.2,48.43 100.84,49.78 100.84,51.69 100.53,51.99 92.71,51.99 91.82,51.1 | 102.2,33.23 R24.1
SCLK_ADE
  Top 0.254: U5.18 57.43,31.12 57.19,31.36 U1.37
SCLK_ISO
  Top 0.254: 84.33,52.2 84.71,52.58
  Top 0.305: U5.3 68.66,30.86 77.22,30.86 84.33,37.97 84.33,52.2 | 84.71,52.58 102.74,52.58 103.25,52.07 103.25,49.4 103.63,49.02 106.55,49.02 107.06,49.53 U9.28
SDA_ARDUINO  (via drill 0.61)
  Top 0.254: v96.52,30.35 96.52,32.47 R23.1
  Top 0.305: U9.25 99.44,35.39 R23.1 | v91.19,18.03 91.19,16.89 90.99,16.7 IC1.5
  Bottom 0.254: v96.52,30.35 96.52,26.59 95.79,25.86 | 95.79,19.72 94.11,18.03 v91.19,18.03
  Bottom 0.305: 95.79,19.72 95.79,25.86
SS_ADE
  Top 0.254: U5.15 57.78,34.92 56.01,36.7 56.01,38.99 55.37,39.62 52.7,39.62 52.58,39.75 | U1.40 47.55,33.2 47.75,33.4 47.88,33.4 49.91,35.43 49.91,39.37 50.29,39.75 52.58,39.75 | 52.58,39.75 52.67,39.84 R54.1
SS_ISO  (via drill 0.61)
  Top 0.254: v104.39,46.61 104.36,46.57 | 109.67,50.74 U9.29 | R20.1 92.2,21.63 v92.2,20.52
  Top 0.305: v104.39,46.61 108.58,46.61 109.67,47.69 109.67,50.74
  Top 0.406: v75.44,35.56 74.8,34.92 U5.6
  Bottom 0.305: v92.2,20.52 92.2,23.88 93.09,24.77 93.09,28.32 85.85,35.56 v75.44,35.56
  Bottom 0.406: v104.39,46.61 86.49,46.61 v75.44,35.56
V+  (via drill 0.38)
  Top 0.254: 80.94,8 C53.1 | 110.07,33.82 109.98,33.91 | R25.2 106.15,32.53 106.15,33.04 | 74.8,48.55 C58.1 | 90.39,20.57 R19.2 | R20.2 93.73,21.8
  Top 0.508: C57.1 75.11,48.71 75.1,48.72 C58.1 | 70.98,28.19 C3.1 70.6,28.58 70.23,28.58 | 70.23,28.58 U5.1 | v72.77,28.32 70.48,28.32 70.23,28.58 | v82.68,8.13 81.06,8.13 C53.1 79.34,8.09 79.12,7.87 79.12,7.13 U6.14 | v71.88,37.59 70.74,38.73 R53.1 73.03,43.85 74.8,45.63 74.8,48.55 C56.1 | C7.1 86.83,21.44 C1.1 86.68,19.3 84.84,17.46 IC1.8 84.84,16.57 82.68,14.41 v82.68,8.13 | C7.1 86.75,21.51 | R62.2 88.14,3.81 84.07,3.81 | R58.2 84.07,3.81 | v82.68,8.13 82.68,4.57 83.44,3.81 84.07,3.81 | 110.07,33.82 R26.2 110.07,29.3 108.46,27.69 108.46,24.64 105.79,21.97 R20.2 | 109.98,33.91 107.53,33.91 106.15,32.53 | R23.2 R24.2 102.02,30.99 102.62,30.99 103.38,31.75 103.38,33.78 103.5,33.91 105.28,33.91 106.15,33.04 | C7.1 88.58,19.69 90.39,19.69 R19.2 | 90.39,20.57 91.4,19.56 93.73,19.56 93.73,21.8
  Bottom 0.508: v72.77,28.32 72.98,29.01 | 72.98,22.03 | 72.98,22.03 72.98,29.01 | 72.98,29.01 72.98,37.33 72.72,37.59 v71.88,37.59 | v82.68,8.13 80.99,9.82 77.17,9.82 76.62,10.37 76.62,18.39 72.98,22.03
VAN
  Top 0.254: 36.35,26.5 36.32,26.47 R33.1 34.16,27.59 C27.1 | U1.19 41.58,28.83 40.26,28.83 38.23,26.8 37.34,26.8 36.96,26.42 36.96,25.92 C52.1 36.35,26.5 | 36.35,26.5
VAP
  Top 0.254: U1.20 41.57,28.32 40.64,28.32 38.88,26.56 | R18.2 31.5,19.73 | 38.35,25.8 C52.2 38.1,25.77 | 33.95,22.14 33.95,22.94 R29.2 | 31.88,22.52 C23.1 31.54,22.42
  Top 0.305: C52.2 38.88,26.56 | 33.95,22.14 36.7,24.89 37.97,24.89 38.1,25.02 38.1,25.77
  Top 0.508: R29.2 31.88,22.52 | 31.54,22.42 R18.2
VCC  (via drill 0.38)
  Top 0.254: J9.VBUS 129.79,17.14 129.76,17.11
  Top 0.508: U2.1 68.84,8.53 71.78,11.47 C49.1 74.68,11.47 C48.1 75.82,11.22 77.56,12.95 v78.11,12.95 78.11,16.64 77.22,17.53 77.22,19.3 76.2,20.32 74.42,20.32 73.47,19.37 C6.1 72.05,19.37 68.84,16.15 U2.7 | 95.25,15.97 C63.2 | C63.2 93.45,16.04 C62.2 90.62,15.69 v90.55,15.62 | C63.2 96.3,16.04 97.36,17.11 129.76,17.11
  Bottom 0.508: v78.11,12.95 80.1,14.94 89.88,14.94 v90.55,15.62
ZX_ADE
  Top 0.254: U1.35 49.27,30.36 50.29,29.34 52.96,29.34 55.12,27.18 55.12,20.32 52.96,18.16 52.96,12.32 53.27,12.01 54.66,12.01 54.72,11.96 U3.2

## Text on the board
tPlace: ADE9000_RESET | CAUTION! HIGH VOLTAGE | IA | IB | SS_ADE | MISO_ADE | IC | MOSI_ADE | SCLK_ADE | NEUTRAL | * | SESCO | IRQ0 | IRQ1 | GND_LIVE
bPlace: SCLK_ISO | SS_ISO
DrillLegend: DRILL LEGEND
FabDoc1: LAYER STACKUP: / --TOP SILKSCREEN / --TOP SOLDERMASK / --TOP LAYER / --BOTTOM LAYER / --BOTTOM SOLDERMASK / --BOTTOM SILKSCREEN / / NOMINAL FINISHED BOARD THICKNESS: 0.062" | PCB SPECIFICATIONS: / --SOLDERMASK: GREEN / --SILKSCREEN: WHITE / --MATERIAL: STANDARD FR4 / --SURFACE FINISH: ENIG / --FINISHED COPPER: 1 Oz